# Altium PCB PCB1.PcbDoc (part 2 of 3)
Units mm, origin at the board's own origin, x right, y up, seen from the top; angles counter-clockwise.
Board outline 130 x 100 mm, 2 copper layers (Top Layer, Bottom Layer), stack 1.571 mm thick; 286 components, 215 nets, 1030 pads, 857 vias.
Unrouted connection lines stored in the file: 4.
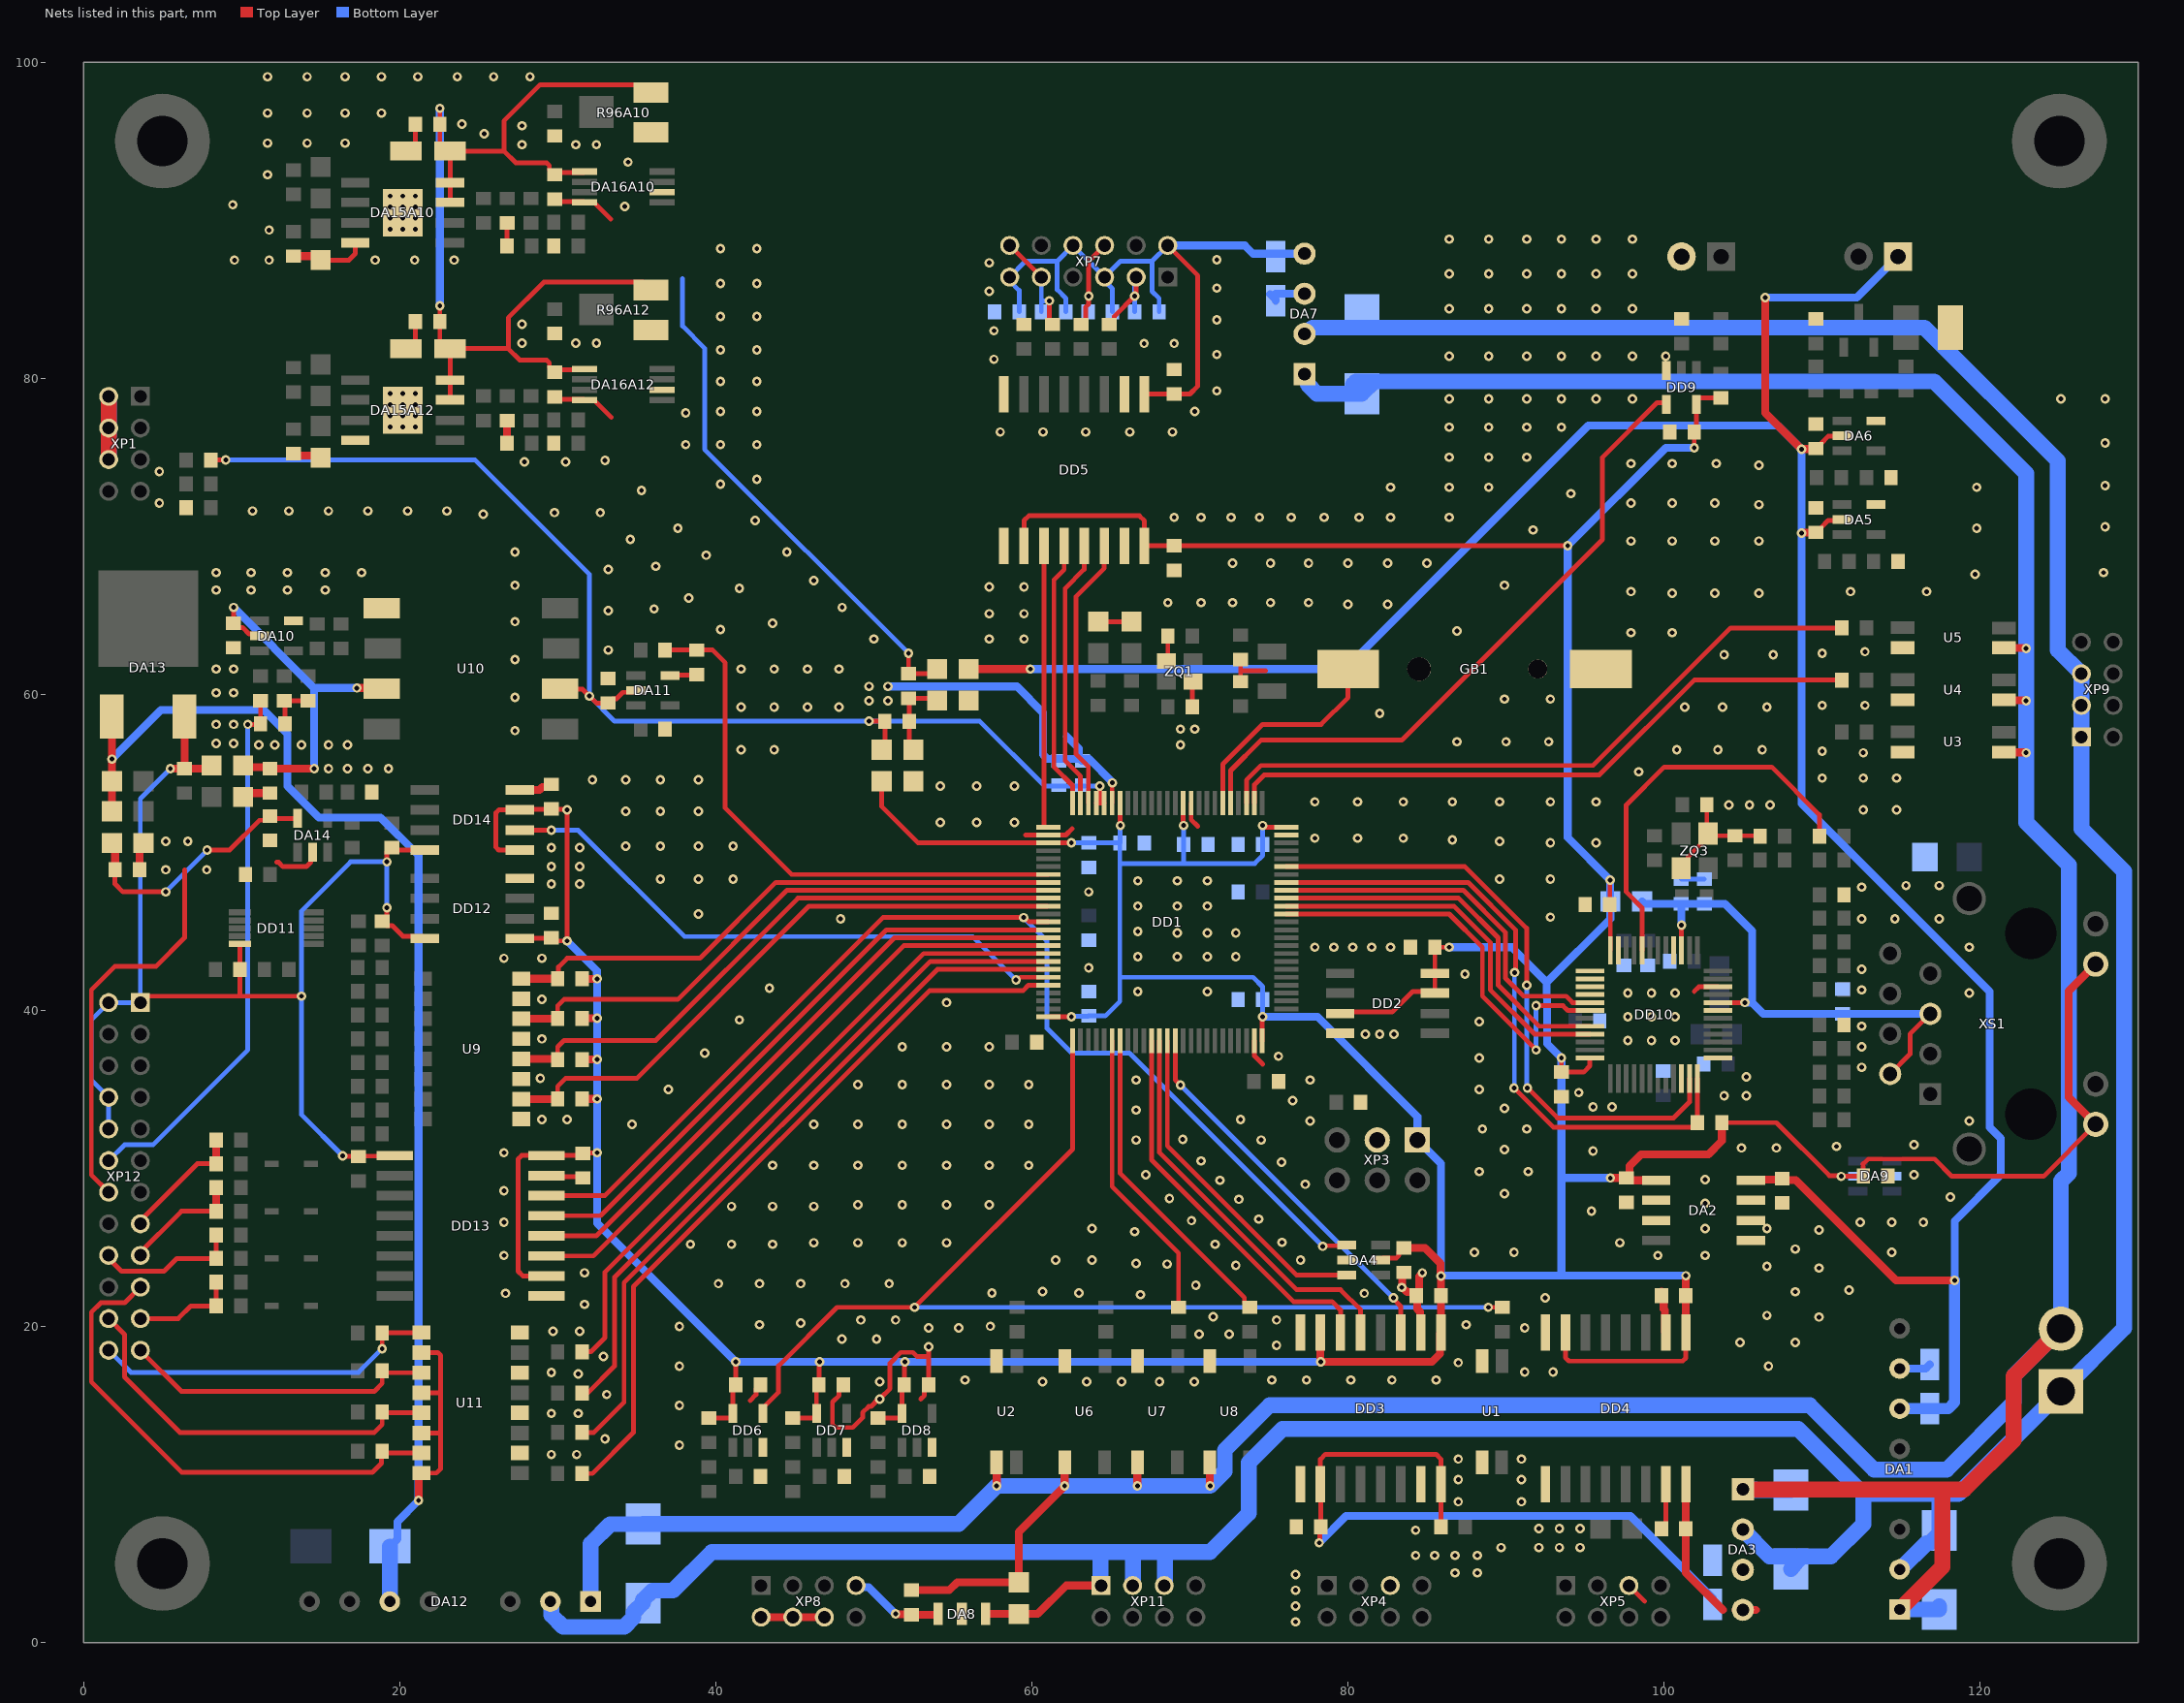
[diagram p2: the nets of this part, all layers, seen from the top]

## Via types
v1: diameter 0.6, hole 0.3, Top Layer to Bottom Layer, tented both sides, 832 vias
v2: diameter 0.6, hole 0.3, Top Layer to Bottom Layer, 25 vias

## Nets (pads, with @x,y where several pads share a name; then routed paths per layer and width w, separated by ;. In a path a pad name is that pad's centre, name@x,y a point inside that pad or via, vN(x,y) a via of type N, cw(c..) or ccw(c..) an arc to the next point about the centre after c; other vN are vias at no path point) (continued)
+3.3V: C5.1 C6.1 C9.2 C10.2 C11.2 C15.1 C16.1 C22.1 C27.1 C28.1 C29.1 C40.1 C47.1 C48.1 C49.1 C51.1 C54.1 C59.1 C64.1 C76.1 C77.1 C80.1 DA2.1 DA4.5 DA9.5 DD1.11 DD1.19 DD1.28 DD1.50 DD1.75 DD1.100 DD2.3 DD2.7 DD2.8 DD3.1 DD3.7 DD4.1 DD4.7 DD5.10 DD5.16 DD6.5 DD7.5 DD8.5 DD9.5 DD10.24 DD10.36 DD12.1 DD13.10 DD13.16 DD14.1 DD14.3 L2.1 L5.1 R24.2 R25.2 R26.2 R32.2 R50.2 R71.1 R73.1 R74.1 R75.1 XP3.1 XS1.9 XS1.11 | length 441.2
  Top Layer w0.3: DD12.1@27.6,44.55 27.625,44.575 29.575,44.575 C76.1@29.6,44.6 29.8,44.4 v1(30.6,44.4) v1(30.6,52.7) 30.575,52.725 29.625,52.725 C80.1@29.6,52.75 29.575,52.725 27.625,52.725 DD14.3@27.6,52.7 26.3,52.7 26.1,52.5 26.1,50.326 26.276,50.15 DD14.1@27.6,50.15 ; DD13.10@29.3,23.2 27.8,23.2 27.5,23.5 27.5,30.6 27.72,30.82 DD13.16@29.3,30.82 31.47,30.82 C77.1@31.6,30.95 31.625,30.975 32.475,30.975 v1(32.5,31) ; R24.2@39.575,14.215 40.95,14.215 41.075,14.34 DD6.5@41.075,14.515 41.075,16.115 C47.1@41.275,16.315 v1(41.275,17.765) v1@41.275,17.815 ; R25.2@44.875,14.215 46.25,14.215 46.375,14.34 DD7.5@46.375,14.515 46.375,16.165 C48.1@46.525,16.315 46.545,16.335 46.545,17.745 v1(46.565,17.765) ; R26.2@50.275,14.215 51.65,14.215 51.775,14.34 DD8.5@51.775,14.515 51.775,16.165 C49.1@51.925,16.315 51.945,16.335 51.945,17.745 v1(51.965,17.765) ; L2.1@50.5,54.5 50.5,52.9 52.8,50.6 DD1.28@61.05,50.6 v1(62.5,50.6) ; DD5.10@59.5,69.4 59.5,71 59.8,71.3 66.8,71.3 67.12,70.98 DD5.16@67.12,69.4 C40.1@69,69.4 v1(93.9,69.4) ; DD1.50@61.05,39.6 v1(62.5,39.6) ; DD1.19@65.575,53.125 65.575,51.725 v1(65.6,51.7) ; DD1.11@69.575,53.125 69.575,51.725 v1(69.6,51.7) ; DD1.75@74.575,38.075 74.575,39.575 v1(74.6,39.6) ; v1(74.6,51.7) 74.681,51.7 74.781,51.6 DD1.100@76.1,51.6 ; v1@78.255,17.715 v1@78.275,17.715 ; DD2.3@79.5,39.9 82.8,39.9 84.1,41.2 85.5,41.2 DD2.8@85.5,42.35 C22.1@85.5,44 v1(86.4,44) ; DA4.5@82.075,24.2 82.2,24.325 83.049,24.325 83.225,24.501 83.225,24.7 83.5,24.975 C29.1@83.55,24.975 ; v1(93.5,37) C64.1@93.5,36.1 94.9,36.1 95.3,36.5 DD10.36@95.3,37 ; DD4.7@93.755,19.615 93.755,18.035 93.975,17.815 101.175,17.815 101.375,18.015 DD4.1@101.375,19.615 ; v1(96.59,48.25) 96.57,48.23 96.57,46.72 C59.1@96.55,46.7 96.6,46.65 DD10.24@96.6,43.8 ; v1(101.9,75.6) C51.1@101.9,76.6 102.049,76.749 102.049,77.349 ; 102.05,77.35 DD9.5@102.05,78.35 102.05,78.625 102.175,78.75 R32.2@103.6,78.75 ; R50.2@103.65,32.9 107.1,32.9 110.45,29.55 111.15,29.55 v1(111.2,29.5) 112.575,29.5 C54.1@112.6,29.525 112.6,30.3 112.9,30.6 117.1,30.6 118.2,29.5 124,29.5 XS1.9@127.3,32.799
  Top Layer w0.5: R75.1@31.55,34.4 v1(32.5,34.4) ; R74.1@31.55,36.9 v1(32.5,36.9) ; R73.1@31.55,39.5 v1(32.5,39.5) ; R71.1@31.55,42 v1(32.5,42) ; v1@78.255,17.715 DD3.7@78.255,19.615 ; v1(78.275,17.765) 85.315,17.765 85.825,18.275 85.825,19.565 DD3.1@85.875,19.615 v1(85.875,23.2) 85.856,23.219 85.856,23.994 84.875,24.975 C29.1@83.55,24.975 ; v1(96.6,29.4) C5.1@97.6,29.4 ; DA2.1@99.5,29.25 97.75,29.25 C5.1@97.6,29.4 ; DD4.1@101.375,19.615 101.375,22.215 v1(101.375,23.215) ; R50.2@103.65,32.9 103.65,31.75 102.8,30.9 98.538,30.9 97.799,30.161 97.799,29.575 97.624,29.4 C5.1@97.6,29.4 ; XS1.9@127.3,32.799 125.6,34.499 125.6,41.229 XS1.11@127.3,42.929
  Bottom Layer w0.3: v1(62.5,39.6) 62.525,39.625 63.575,39.625 C11.2@63.6,39.65 64.65,39.65 65.57,40.57 65.57,42.1 ; v1(62.5,50.6) C10.2@63.6,50.6 C6.1@65.57,50.6 ; v1(65.6,51.7) 65.585,51.685 65.585,50.615 C6.1@65.57,50.6 ; v1(69.6,51.7) C9.2@69.6,50.5 69.6,49.3 ; v1(74.6,39.6) C16.1@74.6,40.7 74.6,41.5 74,42.1 65.57,42.1 ; v1(74.6,51.7) C15.1@74.6,50.5 74.6,49.8 74.1,49.3 69.6,49.3 ; v1(111.2,29.5) 111.213,29.512 112.237,29.512 DA9.5@112.25,29.525 ; 65.57,42.1 65.57,49.3 ; 65.57,49.3 69.6,49.3 ; 65.57,49.3 C6.1@65.57,50.6
  Bottom Layer w0.5: v1(30.6,44.4) 32.481,42.519 32.481,42.019 v1(32.5,42) v1(32.5,39.5) v1(32.5,36.9) v1(32.5,34.4) v1(32.5,31) 32.5,26.54 v1(41.275,17.765) v1(46.565,17.765) v1(51.965,17.765) 78.198,17.765 78.248,17.715 v1@78.275,17.715 ; v1(74.6,39.6) 78.075,39.6 84.39,33.285 XP3.1@84.39,31.8 85.875,30.315 v1@85.875,23.218 ; v1@85.89,23.215 93.5,23.215 ; v1(86.4,44) 90.349,44 92.574,41.774 ; v1(93.9,69.4) 93.9,50.94 v1(96.59,48.25) 96.59,46.91 L5.1@96.6,46.9 96.6,45.8 92.574,41.774 ; v1@93.919,69.419 100.1,75.6 v1(101.9,75.6) ; v1(96.6,29.4) 93.5,29.4 ; v1(101.375,23.215) 93.5,23.215 ; 92.574,41.774 92.574,40.824 92.6,40.799 92.6,37.9 v1(93.5,37) 93.5,29.4 ; 93.5,23.215 93.5,29.4
+3.3VA: C7.1 C8.2 C13.2 C78.1 DA11.2 DD1.21 DD1.22 L2.2 R99.1 U10.6 | length 79.3
  Top Layer w0.3: R99.1@8.05,74.825 v1(9,74.825) ; U10.6@30.15,60.35 30.174,60.326 31.574,60.326 32.45,59.45 C78.1@33.2,59.45 33.475,59.725 33.725,59.725 34.125,60.125 34.825,60.125 DA11.2@34.95,60.25 ; v1(49.7,58.3) C7.1@50.7,58.3 ; L2.2@50.5,56.5 50.7,56.7 C7.1@50.7,58.3 ; C7.1@50.7,58.35 C7.1@50.7,58.3 ; DD1.22@64.075,53.125 64.325,53.125 ; v1(64.3,54.2) 64.3,53.15 64.325,53.125 ; DD1.21@64.575,53.125 64.325,53.125
  Bottom Layer w0.3: v1(9,74.825) 24.775,74.825 32.012,67.588 v1(32.012,59.888) 33.6,58.3 v1(49.7,58.3) 56.7,58.3 60.8,54.2 v1(64.3,54.2)
+3.3VA_ETH: C52.1 C63.1 C66.1 DD10.8 DD10.15 L5.2 XS1.2 XS1.5 | length 33.8
  Top Layer w0.3: DD10.15@101.1,43.8 101.1,44.65 v1(101.1,45.4) ; DD10.8@103.4,40.5 v1(105.1,40.5) ; XS1.2@114.3,35.977 115.559,37.236 115.559,38.506 XS1.5@116.84,39.787
  Bottom Layer w0.5: L5.2@98.6,46.9 98.75,46.75 C63.1@101.075,46.75 ; v1(101.1,45.4) 101.1,46.725 C63.1@101.075,46.75 ; v1(105.1,40.5) 105.567,40.5 ; XS1.5@116.84,39.787 106.28,39.787 105.567,40.5 ; C63.1@101.075,46.75 C66.1@102.542,46.75 103.85,46.75 105.567,45.033 105.567,40.5
+5V: C2.1 C4.1 C31.1 C32.1 DA1.6 DA2.8 DA5.2 DA6.2 L1.1 XP6.1 | length 171.5
  Top Layer w0.3: v1(108.7,70.2) v1@108.725,70.225 ; v1(108.7,75.5) v1@108.725,75.525 ; C32.1@109.575,75.525 C32.1@109.6,75.55 ; C31.1@109.625,70.225 109.925,70.525 109.925,70.551 110.381,71.007 111.207,71.007 DA5.2@111.25,71.05 ; C32.1@109.65,75.55 109.925,75.825 109.925,75.873 110.376,76.323 111.223,76.323 DA6.2@111.25,76.35
  Top Layer w0.5: L1.1@56,61.6 v1(59.9,61.6) ; DA2.8@105.5,29.25 106.1,29.25 106.15,29.3 106.396,29.3 107.4,29.3 C4.1@107.468,29.368 107.567,29.269 108.329,29.269 114.673,22.925 v2(118.375,22.925) ; v1(106.4,85.1) 106.4,77.8 v1(108.7,75.5) ; v1@108.725,70.225 C31.1@109.625,70.225 ; v1@108.725,75.525 C32.1@109.575,75.525
  Bottom Layer w0.5: v1(59.9,61.6) 79.8,61.6 95.2,77 107.2,77 v1(108.7,75.5) v1(108.7,70.2) 108.7,53.1 120.6,41.2 120.6,32.6 121.3,31.9 121.3,29.6 118.375,26.675 v2(118.375,22.925) ; v1(106.4,85.1) 112.2,85.1 XP6.1@114.8,87.7
  Bottom Layer w0.7: DA1.6@114.9,14.8 C2.1@116.8,14.8 117.965,14.8 118.375,15.21 v2(118.375,22.925)
+5V_BUS: C24.1 C25.1 C26.1 DA3.4 DD3.10 DD3.16 DD4.16 R7.1 | length 55.4
  Top Layer w0.3: v1(78.175,6.315) 78.225,6.365 78.225,7.265 C25.1@78.275,7.315 78.265,7.325 78.265,10.005 DD3.10@78.255,10.015 78.255,11.595 78.575,11.915 85.575,11.915 85.875,11.615 DD3.16@85.875,10.015 R7.1@85.875,7.315
  Top Layer w0.5: DD4.16@101.375,10.015 101.375,4.415 103.715,2.075 ; DA3.4@104.54,2.06 105.8,2.06
  Bottom Layer w0.5: v1(78.175,6.315) 79.875,8.015 97.875,8.015 C24.1@103.075,2.815
+5V_FS: C34.1 C35.1 C36.1 C37.1 C39.1 C41.1 DA7.4 DD5.1 XP7.2 XP7.5 XP7.8 XP7.11 | length 46.3
  Top Layer w0.3: DD5.1@67.12,79 C39.1@69,79 70,79 70.5,79.5 70.5,86.5 XP7.2@68.6,88.4
  Bottom Layer w0.3: C34.1@59.2,84.2 59.2,85.556 58.6,86.156 XP7.11@58.6,86.4 59.6,87.4 61.6,87.4 ; C35.1@62.15,84.2 62.15,85.05 61.6,85.6 61.6,87.4 ; C36.1@65.1,84.2 65.1,85.656 64.6,86.156 XP7.5@64.6,86.4 ; C37.1@68.05,84.2 68.05,85.05 67.6,85.5 67.6,87.4 ; XP7.2@68.6,88.4 67.6,87.4 ; 61.6,87.4 XP7.8@62.6,88.4 XP7.5@64.6,86.4 ; XP7.5@64.6,86.4 65.6,87.4 67.6,87.4
  Bottom Layer w0.5: XP7.2@68.6,88.4 73.475,88.4 73.995,87.88 DA7.4@77.25,87.88
+5V_HW: C69.1 C74.1 C75.1 C83.1 C84.1 DA13.3 DD11.10 DD12.8 DD13.1 DD14.8 L6.1 XP12.1 XP12.2 XP12.8 XP12.10 | length 83.1
  Top Layer w0.3: XP12.1@3.6,40.5 4,40.9 9.9,40.9 ; DD11.10@9.9,44.2 C69.1@9.9,42.6 9.9,40.9 ; v1(13.8,40.9) 9.9,40.9 ; v1(16.4,30.8) 16.425,30.775 17.425,30.775 17.435,30.785 19.665,30.785 DD13.1@19.7,30.82 ; C74.1@18.8,45.65 18.925,45.65 19.2,45.925 v1(19.2,46.5) ; C74.1@18.9,45.65 19.175,45.375 19.525,45.375 20.2,44.7 21.45,44.7 DD12.8@21.6,44.55 ; v1(19.2,49.4) 19.2,50.025 19.475,50.3 C83.1@19.5,50.3 19.65,50.15 DD14.8@21.6,50.15
  Top Layer w0.5: v1(5.5,55.3) C84.1@6.4,55.3 ; DA13.3@6.375,58.6 6.4,58.575 C84.1@6.4,55.3 ; L6.1@8.1,55.5 7.9,55.3 C84.1@6.4,55.3
  Bottom Layer w0.3: XP12.10@1.6,32.5 XP12.8@1.6,34.5 0.5,35.6 0.5,39.4 XP12.2@1.6,40.5 XP12.1@3.6,40.5 3.6,53.4 v1(5.5,55.3) ; v1(16.4,30.8) 13.8,33.4 v1(13.8,40.9) 13.8,46.3 16.9,49.4 v1(19.2,49.4) v1(19.2,46.5)
+5VA: C3.1 C92A10.1 C92A12.1 C93A10.1 C93A12.1 C96A10.1 C96A12.1 DA15A10.7 DA15A10.8 DA15A12.7 DA15A12.8 DA16A10.1 DA16A12.1 L1.2 R96A10.3 R96A12.3 | length 101.3
  Top Layer w0.3: v1(22.55,84.575) C92A12.1@22.55,83.575 22.55,82.325 23,81.875 C93A12.1@23.2,81.875 ; v1(22.55,97.075) C92A10.1@22.55,96.075 22.55,94.825 23,94.375 C93A10.1@23.2,94.375 ; DA15A12.7@23.2,78.625 DA15A12.8@23.2,79.875 C93A12.1@23.2,81.875 ; DA15A10.7@23.2,91.125 DA15A10.8@23.2,92.375 C93A10.1@23.2,94.375 ; DA16A12.1@31.7,80.575 31.65,80.525 29.95,80.525 C96A12.1@29.8,80.375 29.75,80.375 29.475,80.65 29.475,80.974 29.299,81.15 27.6,81.15 26.875,81.875 ; DA16A10.1@31.7,93.075 31.65,93.025 29.95,93.025 C96A10.1@29.8,92.875 29.75,92.875 29.475,93.15 29.475,93.449 29.299,93.625 27.35,93.625 26.6,94.375 ; R96A12.3@35.9,85.575 35.4,86.075 29.125,86.075 26.875,83.825 26.875,81.875 ; R96A10.3@35.9,98.075 35.4,98.575 28.9,98.575 26.6,96.275 26.6,94.375 ; v1(52.2,62.6) C3.1@52.2,61.3 53.7,61.3 L1.2@54,61.6 ; C93A12.1@23.2,81.875 26.875,81.875 ; C93A10.1@23.2,94.375 26.6,94.375
  Bottom Layer w0.3: 37.9,86.3 37.9,83.3 39.3,81.9 39.3,75.5 v1(52.2,62.6)
  Bottom Layer w0.5: v1(22.55,84.575) v1(22.55,97.075)
+5VA_HW: C71.1 C88.1 DA10.2 L6.2 U10.3 | length 24.3
  Top Layer w0.3: C71.1@9.3,64.3 9.368,64.232 10.068,64.232 10.475,63.825 11.025,63.825 DA10.2@11.15,63.7 ; C71.1@9.5,64.5 v1(9.5,65.5) ; U10.3@18.825,60.4 U10.3@18.875,60.35
  Top Layer w0.5: L6.2@10.1,55.5 10.2,55.4 11.7,55.4 C88.1@11.8,55.3 v1(14.6,55.3) ; v1(17.3,60.4) U10.3@18.825,60.4
  Bottom Layer w0.5: v1(9.5,65.5) 14.6,60.4 ; v1(14.6,55.3) 14.6,60.4 ; v1(17.3,60.4) 14.6,60.4
+12V: C43.1 DA8.1 XP8.7 | length 6
  Top Layer w0.5: v1(51.375,1.815) 51.394,1.796 52.506,1.796 52.525,1.815 52.575,1.765 54.04,1.765 54.04,1.78 DA8.1@54.075,1.815
  Bottom Layer w0.5: XP8.7@48.875,3.615 48.98,3.51 49.68,3.51 v1@51.356,1.834
+24V: C1.1 C23.1 C38.1 C42.2 C81.1 DA1.2 DA3.2 DA7.2 DA8.3 DA12.2 XP2.1 XP9.1 XP9.3 XP9.5 XP11.1 XP11.3 XP11.5 | length 254.2
  Top Layer w0.5: DA8.3@57.075,1.815 C42.2@59.175,1.815 60.375,1.815 62.175,3.615 XP11.1@64.375,3.615
  Bottom Layer w1: DA12.2@29.597,2.543 29.597,1.755 30.352,1 34.214,1 34.8,1.586 34.8,1.915 35.4,2.515 35.4,2.7 36,3.3 37.3,3.3 39.74,5.74 64.35,5.74 ; XP11.1@64.375,3.615 64.35,3.64 64.35,5.74 ; XP11.3@66.375,3.615 66.4,3.64 66.4,5.715 66.425,5.74 ; XP11.5@68.375,3.615 68.413,3.653 68.413,5.653 68.5,5.74 ; DA7.2@77.119,82.669 77.228,82.669 77.758,83.2 116.475,83.2 124.9,74.775 124.9,62.8 XP9.5@126.362,61.338 ; DA3.2@104.975,7.155 106.665,5.465 C23.1@108.235,5.465 ; C23.1@108.025,4.665 108.531,5.265 108.531,5.45 110.55,5.45 112.6,7.5 112.6,9.4 ; DA1.2@114.94,4.64 116.6,6.3 116.8,6.3 117.4,6.9 C1.1@117.4,7.1 117.4,9.4 ; XP9.5@126.4,61.3 XP9.3@126.4,59.3 XP9.1@126.4,57.3 126.4,51.5 129.1,48.8 129.1,19.9 XP2.1@125.1,15.9 118.6,9.4 117.4,9.4 ; 64.35,5.74 66.425,5.74 ; 66.425,5.74 68.5,5.74 ; 68.5,5.74 71.275,5.74 73.725,8.19 73.725,11.39 75.85,13.515 108.485,13.515 112.6,9.4 ; 112.6,9.4 117.4,9.4
+24V_HW: C82.2 C85.1 DA12.6 DA13.1 L7.1 U11.10 U11.12 U11.14 U11.16 | length 94.5
  Top Layer w0.3: U11.16@21.38,10.73 22.33,10.73 22.6,11 22.6,13.2 ; U11.14@21.38,13.27 22.53,13.27 22.6,13.2 ; U11.12@21.38,15.81 22.59,15.81 22.6,15.8 ; U11.10@21.38,18.35 22.424,18.35 22.6,18.174 22.6,15.8 ; 22.6,13.2 22.6,15.8
  Top Layer w0.5: L7.1@1.8,52.6 C82.2@1.8,54.5 v1(1.8,55.9) DA13.1@1.8,58.6 ; v1(21.2,9) 21.219,9.019 21.219,10.569 U11.16@21.38,10.73
  Bottom Layer w0.5: v1(1.8,55.9) 4.9,59 11.4,59 12.9,57.5 12.9,54.2 14.9,52.2 18.8,52.2 21.2,49.8 v1(21.2,9) 19.857,7.657 19.857,6.557 C85.1@19.38,6.08
  Bottom Layer w1: DA12.6@19.38,2.6 C85.1@19.38,6.08
+24VA_HW: C87.1 C89.1 DA14.5 L7.2 | length 16.4
  Top Layer w0.3: L7.2@1.8,50.6 L7.2@2,50.4 ; C89.1@2,48.9 2,48 2.5,47.5 v1(5.2,47.5) ; v1(7.825,50.15) 9.25,50.15 11.132,52.032 11.532,52.032 C87.1@11.8,52.3 ; C87.1@11.8,52.15 DA14.5@13.55,52.15
  Top Layer w0.5: C89.1@2,48.9 L7.2@2,50.4
  Bottom Layer w0.3: v1(5.2,47.5) v1@7.825,50.125
+VBAT: DD1.6 GB1.2 | length 13.9
  Top Layer w0.3: DD1.6@72.075,53.125 72.075,55.575 74.6,58.1 78.3,58.1 80,59.8 GB1.2@80,61.6
ACTn: DD10.20 R42.2 | length 25.4
  Top Layer w0.3: DD10.20@98.6,43.8 98.6,46.5 97.6,47.5 97.6,53 100,55.4 106.8,55.4 109.825,52.375 R42.2@109.825,51.012
AGND: C3.2 C7.2 C8.1 C13.1 C78.2 C79.2 C90A10.1 C90A12.1 C92A10.2 C92A12.2 C93A10.2 C93A12.2 C94A10.2 C94A12.2 C95A10.2 C95A12.2 C96A10.2 C96A12.2 C97.2 DA11.5 DA15A10.4 DA15A10.EPAD DA15A12.4 DA15A12.EPAD DA16A10.4 DA16A10.6 DA16A12.4 DA16A12.6 DD1.20 R1.2 R2.2 R76.2 R91A10.2 R91A12.2 R95A10.1 R95A12.1 R96A10.1 R96A12.1 R97A10.2 R97A12.2 XP1.2 XP1.4 XP1.6 | length 58.2
  Top Layer w0.3: R91A10.2@15,87.475 16.8,87.475 17.2,87.875 DA15A10.4@17.2,88.575 ; C93A10.2@20.4,94.375 20.55,94.375 21,94.825 C92A10.2@21,96.075 ; C93A12.2@21,82.225 C92A12.2@21,83.575 ; R97A10.2@26.8,88.375 C94A10.2@26.8,89.825 ; C96A12.2@29.8,78.825 29.95,78.675 31.65,78.675 DA16A12.4@31.7,78.625 32.3,78.625 33.4,77.525 ; C96A10.2@29.8,91.325 29.95,91.175 31.65,91.175 DA16A10.4@31.7,91.125 32.3,91.125 33.35,90.075 ; DA11.5@37.1,61.2 37.125,61.225 38.775,61.225 C79.2@38.8,61.25 ; C3.2@52.2,59.75 C3.2@52.25,59.75 ; R2.2@52.5,56.5 52.25,56.75 C7.2@52.25,58.3 C3.2@52.25,59.75 ; R1.2@53.8,59.6 53.65,59.75 C3.2@52.25,59.75 ; DD1.20@65.075,53.125 65.075,54.375 v1(65.1,54.4)
  Top Layer w0.5: C90A12.1@13.3,75.225 13.425,75.1 14.875,75.1 R91A12.2@15,74.975 ; C90A10.1@13.3,87.725 14.75,87.725 R91A10.2@15,87.475 ; C93A12.2@20.4,81.875 20.65,81.875 C93A12.2@21,82.225 ; R97A12.2@26.8,75.875 C94A12.2@26.8,77.325
  Top Layer w1: XP1.6@1.6,74.85 XP1.4@1.6,76.85 XP1.2@1.6,78.85
  Bottom Layer w0.5: v1(50.9,60.5) 59.049,60.5 60.711,58.837 60.711,56.189 60.989,55.911 C13.1@63.039,55.911 ; 62.209,57.337 62.975,56.571 62.975,55.975 C13.1@63.039,55.911 ; C13.1@63.2,55.8 63.15,55.8 C13.1@63.039,55.911 ; v1(65.1,54.4) 65.1,54.449 63.637,55.911 C13.1@63.039,55.911
  Bottom Layer w1: XP1.6@1.6,74.85 XP1.2@1.6,78.85
  other v1: 41.6,56.5 43.7,56.5 27.3,57.7 41.6,59.2 43.7,59.2 45.8,59.2 47.8,59.2 49.7,59.6 50.9,59.6 27.3,59.8 49.7,60.5 41.6,61.6 43.7,61.6 45.8,61.6 47.8,61.6 27.3,62.2 33.2,62.8 50,63.5 40.3,64.1 43.6,64.5 27.3,64.6 33.2,65.3 36.1,65.4 48,65.5 38.3,66.1 41.5,66.7 27.3,66.9 46.2,67.2 33.2,67.9 36.2,68.1 39.4,68.8 27.3,69 44.5,69 34.6,69.8 37.6,70.5 42.5,71 25.3,71.4 29.8,71.5 32.7,71.5 10.7,71.6 13,71.6 15.5,71.6 18,71.6 20.5,71.6 23,71.6 4.8,72.1 35.3,72.9 40.3,73.3 42.6,73.6 4.8,74.1 27.9,74.7 30.5,74.7 33,74.8 38.1,75.8 40.3,75.8 42.6,75.8 38.1,77.8 40.3,77.9 42.6,77.9 40.3,79.8 42.6,79.8 40.3,81.8 42.6,81.8 27.75,82.225 31.15,82.225 32.45,82.225 27.75,83.425 40.3,83.9 42.6,83.9 40.3,86 42.6,86 9.55,87.475 11.75,87.475 18.45,87.475 20.95,87.475 23.45,87.475 40.3,88.2 42.6,88.2 11.75,89.375 34.25,90.875 9.45,90.975 11.65,92.875 34.45,93.675 27.75,94.775 31.15,94.775 32.45,94.775 11.65,94.875 14.15,94.875 16.55,94.875 25.35,95.475 27.75,95.975 23.95,96.075 11.65,96.775 14.15,96.775 16.55,96.775 18.85,96.775 11.65,99.075 14.15,99.075 16.55,99.075 18.85,99.075 21.15,99.075 23.65,99.075 25.95,99.075 28.25,99.075
  other v2: 19.4,76.925 20.2,76.925 21,76.925 19.4,77.625 20.2,77.625 21,77.625 19.4,78.325 20.2,78.325 21,78.325 19.4,79.025 20.2,79.025 21,79.025 19.4,89.425 20.2,89.425 21,89.425 19.4,90.125 20.2,90.125 21,90.125 19.4,90.825 20.2,90.825 21,90.825 19.4,91.525 20.2,91.525 21,91.525
AGND_HW: C71.2 C86.2 C87.2 C88.2 C89.2 DA10.5 DA14.2 R53.2 R60.2 R72.2 R83.2 R84.1 R85.2 U10.1 XP12.14 | length 34.6
  Top Layer w0.3: XP12.14@1.6,28.5 0.5,29.6 0.5,41.3 2,42.8 4.6,42.8 6.4,44.6 6.4,48.9 ; R85.2@3.55,50.35 R85.2@3.8,50.6 ; 12.225,49.375 12.349,49.375 12.624,49.1 14.099,49.1 14.375,49.376 14.375,49.875 DA14.2@14.5,50 ; R53.2@12.75,58.15 12.75,59.55 R60.2@12.7,59.6 R72.2@14.2,59.6 ; U10.1@18.825,65.5 U10.1@18.875,65.45
  Top Layer w0.5: C89.2@3.55,48.9 R85.2@3.55,50.35 ; R83.2@10.1,53.5 10.35,53.75 C88.2@11.8,53.75 C88.2@11.9,53.75
  other v1: 5.2,48.9 7.8,48.9 5.2,50.7 6.6,50.7 15.5,55.3 16.7,55.3 18,55.3 19.3,55.3 11.1,56.8 12.1,56.8 13.8,56.8 15.5,56.8 16.7,56.8 8.4,56.9 9.5,56.9 8.4,58.1 9.5,58.1 8.4,60.1 9.5,60.1 8.4,61.6 9.5,61.6 8.4,66.6 10.6,66.6 12.9,66.6 15.3,66.6 8.4,67.7 10.6,67.7 12.9,67.7 15.3,67.7 17.6,67.7
AN_MOD: DD1.62 DD3.5 | length 25.4
  Top Layer w0.3: DD1.62@68.075,38.075 68.075,31 76.75,22.325 79.525,22.325 80.795,21.055 DD3.5@80.795,19.615
AN_MOD_HW: R53.1 R56.1 XP12.12 | length 34.5
  Top Layer w0.3: v1(10.4,58.1) 11.15,58.1 R53.1@11.2,58.15 R56.1@11.2,59.6
  Bottom Layer w0.3: XP12.12@1.6,30.5 2.6,31.5 4.4,31.5 10.4,37.5 v1@10.4,58.074
BUS_IL: DD1.61 DD3.6 | length 24.8
  Top Layer w0.3: DD1.61@67.575,38.075 67.575,30.55 76.55,21.575 79,21.575 79.525,21.05 DD3.6@79.525,19.615
COM1_HW: R55.2 R62.1 XP12.17 | length 7.7
  Top Layer w0.3: XP12.17@3.4,24.5 6.2,27.3 R62.1@8.4,27.3
  Top Layer w0.5: R62.1@8.4,27.3 R55.2@8.4,28.8
COM2_HW: R58.2 R69.1 XP12.18 | length 9.2
  Top Layer w0.3: XP12.18@1.4,24.5 2.4,23.5 5.1,23.5 5.9,24.3 R69.1@8.4,24.3 R58.2@8.4,25.8
COM3_HW: R61.2 R63.1 XP12.21 | length 6.6
  Top Layer w0.3: XP12.21@3.6,20.5 6,20.5 6.8,21.3 R63.1@8.4,21.3 R61.2@8.4,22.8
CRASH_COL: DD1.57 R35.2 | length 20.3
  Top Layer w0.3: DD1.57@65.575,38.075 65.575,29.7 73.45,21.825 73.45,21.49 73.725,21.215 R35.2@73.775,21.215
CRASH_IND: DD1.3 R30.2 | length 43.1
  Top Layer w0.3: DD1.3@73.575,53.125 73.575,54.575 74.5,55.5 95.5,55.5 104.2,64.2 R30.2@111.25,64.2
DIG_MOD: DA4.3 DD1.63 | length 21.6
  Top Layer w0.3: DD1.63@68.575,38.075 68.575,31.425 76.75,23.25 DA4.3@80.1,23.25
DIG_MOD_HW: R52.2 R68.1 XP12.15 | length 8.1
  Top Layer w0.3: XP12.15@3.4,26.5 7.2,30.3 R68.1@8.4,30.3
  Top Layer w0.5: R68.1@8.4,30.3 R52.2@8.4,31.8
DRV_ON: DD1.64 DD3.3 | length 24.4
  Top Layer w0.3: DD1.64@69.075,38.075 69.075,35.601 v1(69.4,35.275) ; v1(82.883,21.815) 82.883,21.734 83.335,21.281 DD3.3@83.335,19.615
  Bottom Layer w0.3: v1(69.4,35.275) v1@82.86,21.815
EMER_BUT: DD1.51 DD6.4 R9.1 | length 71.7
  Top Layer w0.3: DD6.4@42.975,14.515 42.975,14.84 43.975,15.84 43.975,17.515 47.675,21.215 v1(52.575,21.215) 62.575,31.215 DD1.51@62.575,38.075 ; v1(88.875,21.215) R9.1@89.775,21.215
  Bottom Layer w0.3: v1(52.575,21.215) v1(88.875,21.215)
EMIS_COL: DD1.56 R34.2 | length 18.6
  Top Layer w0.3: DD1.56@65.075,38.075 65.075,28.85 69.275,24.65 R34.2@69.275,21.215
EMIS_IND: DD1.2 R29.2 | length 41.1
  Top Layer w0.3: DD1.2@74.075,53.125 74.075,54.275 74.7,54.9 95.9,54.9 101.9,60.9 R29.2@111.25,60.9
ETH_CS: DD1.92 DD10.29 | length 23.8
  Top Layer w0.3: DD1.92@76.1,47.6 87.3,47.6 89.95,44.95 89.95,42.05 91.1,40.9 93.8,40.9 94.2,40.5 DD10.29@95.3,40.5
ETH_INT: DD1.95 DD10.47 | length 39.9
  Top Layer w0.3: DD1.95@76.1,49.1 87.4,49.1 91.3,45.2 v1(91.3,41.6) ; v1(91.35,35.1) 93.25,33.2 100.6,33.2 101.6,34.2 DD10.47@101.6,35.7
  Bottom Layer w0.3: v1(91.3,41.6) 91.3,35.15 v1(91.35,35.1)
ETH_MISO: DD1.90 DD10.33 | length 24.3
  Top Layer w0.3: DD1.90@76.1,46.6 86.7,46.6 89,44.3 89,41.3 91.8,38.5 DD10.33@95.3,38.5
ETH_MOSI: DD1.91 DD10.32 | length 24.3
  Top Layer w0.3: DD1.91@76.1,47.1 87,47.1 89.5,44.6 89.5,41.6 92.1,39 DD10.32@95.3,39
ETH_RST: DD1.93 DD10.48 R50.1 | length 41.4
  Top Layer w0.3: DD1.93@76.1,48.1 87.6,48.1 90.6,45.1 90.6,42.45 v1(90.55,42.4) ; v1(90.5,35.1) 93,32.6 101.825,32.6 102.1,32.875 R50.1@102.1,32.9 DD10.48@102.1,35.7
  Bottom Layer w0.3: v1(90.5,35.1) 90.525,35.125 90.525,42.375 v1(90.55,42.4)
ETH_SCLK: DD1.89 DD10.30 | length 27.5
  Top Layer w0.3: DD1.89@76.1,46.1 86.4,46.1 88.5,44 88.5,40.9 v1(91.9,37.5) ; v1(91.9,40.3) 93.6,40.3 93.9,40 DD10.30@95.3,40
  Bottom Layer w0.3: v1(91.9,37.5) v1(91.9,40.3)
EXT_AN_MOD: C79.1 DD1.32 R77.2 | length 35.5
  Top Layer w0.3: R77.2@36.8,62.8 C79.1@38.8,62.8 39.8,62.8 40.6,62 40.6,52.8 44.8,48.6 DD1.32@61.05,48.6
EXT_COM1: DD1.39 DD13.13 | length 39.2
  Top Layer w0.3: DD13.13@29.3,27.01 32.71,27.01 50.8,45.1 DD1.39@61.05,45.1
EXT_COM2: DD1.40 DD13.12 | length 39.6
  Top Layer w0.3: DD13.12@29.3,25.74 32.44,25.74 51.3,44.6 DD1.40@61.05,44.6
EXT_COM3: DD1.41 DD13.11 | length 39.9
  Top Layer w0.3: DD13.11@29.3,24.47 32.27,24.47 51.9,44.1 DD1.41@61.05,44.1
EXT_DIG_MOD: DA4.1 DD1.38 DD13.14 | length 71.5
  Top Layer w0.3: DD13.14@29.3,28.28 32.98,28.28 50.575,45.875 v1(59.475,45.875) 59.556,45.875 59.831,45.6 DD1.38@61.05,45.6 ; v1(78.401,25.076) 78.438,25.113 79.888,25.113 DA4.1@79.925,25.15
  Bottom Layer w0.3: v1(59.475,45.875) 60.95,44.4 60.95,38.875 62.525,37.3 66.176,37.3 v1(78.401,25.076)
EXT_FLAG1: DD1.46 R78.2 | length 47.7
  Top Layer w0.3: R78.2@31.55,10.7 32.2,10.7 34.8,13.3 34.8,22.525 53.525,41.25 59.439,41.25 59.789,41.6 DD1.46@61.05,41.6
EXT_FLAG2: DD1.44 R79.2 | length 46.1
  Top Layer w0.3: R79.2@31.55,13.3 32.3,13.3 34.2,15.2 34.2,22.775 54.025,42.6 DD1.44@61.05,42.6
EXT_FLAG3: DD1.43 R80.2 | length 44.2
  Top Layer w0.3: R80.2@31.55,15.8 31.9,15.8 33.6,17.5 33.6,23.125 53.575,43.1 DD1.43@61.12,43.1
EXT_FLAG4: DD1.42 R81.2 | length 42.3
  Top Layer w0.3: R81.2@31.55,18.4 32.1,18.4 33,19.3 33,23.45 53.15,43.6 DD1.42@60.959,43.6
EXT_IL1: DD1.33 R71.2 U9.16 | length 36.2
  Top Layer w0.3: R71.2@30,42 30.055,42.055 30.055,42.749 30.606,43.3 39,43.3 43.8,48.1 60.337,48.1 DD1.33@60.943,48.1
  Top Layer w0.5: U9.16@27.7,42.01 R71.2@30,42.01
EXT_IL2: DD1.34 R73.2 U9.14 | length 37.2
  Top Layer w0.3: R73.2@30,39.5 30,40.3 30.4,40.7 37.6,40.7 44.5,47.6 DD1.34@61.05,47.6
  Top Layer w0.5: U9.14@27.7,39.47 R73.2@30,39.47
EXT_KEY: DD1.35 R74.2 U9.12 | length 38
  Top Layer w0.3: R74.2@30,36.9 30,37.7 30.4,38.1 36.2,38.1 45.2,47.1 DD1.35@61.05,47.1
  Top Layer w0.5: U9.12@27.7,36.93 R74.2@30,36.93
EXT_MP_EN: DD1.36 R75.2 U9.10 | length 38.8
  Top Layer w0.3: R75.2@30,34.4 30,35.2 30.5,35.7 35,35.7 45.9,46.6 60.337,46.6 DD1.36@61,46.6
  Top Layer w0.5: U9.10@27.7,34.39 R75.2@30,34.39
EXT_PMO: DD1.45 DD14.2 | length 37.3
  Top Layer w0.3: DD14.2@27.719,51.4 v1(29.6,51.4) ; v1(59,41.925) 59.081,41.925 59.256,42.1 DD1.45@61.05,42.1
  Bottom Layer w0.3: v1(29.6,51.4) 31.3,51.4 38.025,44.675 56.25,44.675 v1(59,41.925)
FIBER_IL: DD1.5 DD9.4 | length 42.3
  Top Layer w0.3: DD1.5@72.575,53.125 72.575,55.175 74.5,57.1 83.4,57.1 96.1,69.8 96.1,75 99.55,78.45 DD9.4@100.15,78.45
FLAG1_HW: R86.2 U11.15 XP12.19 | length 32.3
  Top Layer w0.3: XP12.19@3.6,22.5 2.6,21.5 1.1,21.5 0.5,20.9 0.5,16.5 6.23,10.77 18.27,10.77 18.851,11.351 18.851,11.951 18.9,12 U11.15@21.38,12
FLAG2_HW: R87.2 U11.13 XP12.22 | length 25.3
  Top Layer w0.3: XP12.22@1.6,20.5 2.6,19.5 2.6,16.8 6.1,13.3 18.4,13.3 18.9,13.8 18.9,14.54 U11.13@21.38,14.54
FLAG3_HW: R89.2 U11.11 XP12.23 | length 19.9
  Top Layer w0.3: XP12.23@3.6,18.5 6.2,15.9 18.4,15.9 18.9,16.4 R89.2@18.9,17.2 ; R89.2@18.83,17.08 U11.11@21.38,17.08
FLAG4_HW: R90.2 U11.9 XP12.24 | length 22
  Top Layer w0.3: v1(18.9,18.6) R90.2@18.9,19.6 U11.9@21.36,19.6
  Bottom Layer w0.3: XP12.24@1.6,18.5 3,17.1 17.4,17.1 v1(18.9,18.6)
FLOW1: DD1.23 DD5.14 | length 17.3
  Top Layer w0.3: DD1.23@63.575,53.125 63.575,55.425 62.8,56.2 62.8,66.2 64.576,67.976 64.576,69.396 DD5.14@64.58,69.4
FLOW2: DD1.24 DD5.13 | length 17.2
  Top Layer w0.3: DD1.24@63.075,53.125 63.075,54.825 62.1,55.8 62.1,66.7 63.31,67.91 DD5.13@63.31,69.4
FLOW3: DD1.25 DD5.12 | length 17
  Top Layer w0.3: DD5.12@62.04,69.4 62.04,67.891 61.4,67.251 61.4,55.4 62.575,54.225 DD1.25@62.575,53.125
FLOW4: DD1.26 DD5.11 | length 18.1
  Top Layer w0.3: DD5.11@60.77,69.4 60.77,51.6 DD1.26@61.05,51.6
GND: C2.2 C4.2 C5.2 C6.2 C9.1 C10.1 C11.1 C12.2 C14.2 C15.2 C16.2 C17.2 C18.2 C19.2 C20.2 C21.2 C22.2 C27.2 C28.2 C29.2 C30.2 C31.2 C32.2 C40.2 C44.2 C45.2 C46.2 C47.2 C48.2 C49.2 C50.2 C51.2 C52.2 C53.2 C54.2 C55.2 C56.2 C57.2 C58.2 C59.2 C60.2 C61.2 C62.2 C63.2 C64.2 C65.2 C66.2 C67.2 C68.2 C76.2 C77.2 C80.2 DA1.7 DA2.2 DA2.3 DA2.5 DA2.6 DA2.7 DA4.2 DA5.5 DA6.5 DA9.2 DD1.10 DD1.27 DD1.74 DD1.99 DD2.4 DD3.2 DD3.8 DD4.2 DD4.8 DD5.9 DD5.15 DD6.3 DD7.3 DD8.3 DD9.3 DD10.1 DD10.7 DD10.10 DD10.16 DD10.23 DD10.25 DD10.26 DD10.27 DD10.28 DD10.46 DD12.4 DD13.9 DD13.15 DD14.4 GB1.1 R1.1 R2.1 R3.2 R4.2 R12.2 R15.1 R16.1 R46.1 U1.2 U2.2 U3.2 U4.2 U5.2 U6.3 U7.3 U8.3 U9.9 U9.11 U9.13 U9.15 U11.2 U11.4 U11.6 U11.8 VD1.2 VD2.2 XP3.3 XP8.2 XP8.4 XP8.6 XP10.2 ZQ1.2 ZQ1.4 ZQ3.2 ZQ3.4 | length 62.3
  Top Layer w0.3: DD13.15@29.3,29.55 29.375,29.475 31.525,29.475 C77.2@31.6,29.4 ; 42.168,15.308 42.55,15.69 42.55,16.04 C47.2@42.825,16.315 ; C48.2@48.075,16.315 47.807,16.047 47.807,15.647 47.385,15.225 47.385,13.791 47.56,13.615 48.674,13.615 49.295,14.236 49.295,14.559 49.676,14.94 49.819,14.94 50.285,15.406 50.285,15.505 50.465,15.505 51.025,16.065 51.025,17.674 51.716,18.365 52.47,18.365 52.72,18.115 53.475,18.115 ; 52.964,15.404 53.207,15.647 53.207,16.047 C49.2@53.475,16.315 53.475,18.115 ; v1(53.475,18.715) 53.475,18.115 ; 59.6,51.1 DD1.27@61.05,51.1 62.151,51.1 62.551,51.5 ; VD2.2@64.2,64.6 VD1.2@66.3,64.6 ; ZQ1.2@68.5,62.1 68.6,62.2 C18.2@68.6,63.7 ; DD1.10@70.075,53.125 70.075,52.074 70.5,51.649 ; C20.2@70.15,59.2 70.15,60.75 ZQ1.4@70.2,60.8 ; C19.2@73.2,60.8 73.2,61.5 ; C21.2@73.2,62.2 73.2,61.5 ; DD1.74@74.075,38.075 74.075,37.125 74.6,36.6 ; 74.8,61.5 73.2,61.5 ; ZQ3.4@101.075,49 101.525,49.45 101.525,49.725 102.325,50.525 102.325,50.75 ZQ3.2@102.775,51.2 102.7,51.275 C60.2@102.7,53 ; 101.9,41.2 102.2,41.5 DD10.10@103.4,41.5 ; ZQ3.2@102.925,51.05 C58.2@104.475,51.05 106.037,51.05 R46.1@106.075,51.012
  Top Layer w0.5: DD14.4@27.6,53.95 27.605,53.955 28.855,53.955 29.025,54.125 29.425,54.125 C80.2@29.6,54.3 ; XP8.2@42.875,1.615 XP8.4@44.875,1.615 XP8.6@46.875,1.615 ; C29.2@83.55,23.425 83.419,23.294 83.419,22.494 v1(83.4,22.475) 83.427,22.475 83.727,22.175 84.15,22.175 84.325,22 C27.2@84.325,21.95 ; DD3.2@84.605,19.615 84.555,19.665 84.555,20.935 84.38,21.11 84.38,21.895 C27.2@84.325,21.95 ; v1(84.7,23.4) 84.7,23.373 84.5,23.173 84.5,22.125 C27.2@84.325,21.95 ; C28.2@99.825,22.215 99.975,22.065 99.975,21.115 100.055,21.035 100.055,19.665 DD4.2@100.105,19.615
  Bottom Layer w0.3: C63.2@101.075,48.3 C66.2@102.542,48.3
  Bottom Layer w0.5: DA1.7@114.9,17.34 116.54,17.34 C2.2@116.8,17.6
  other v1: 29.6,11.9 31.2,11.9 37.7,12.5 33,12.9 29.6,14.5 31.3,14.5 37.7,15 50.375,15.415 33.1,15.7 50.375,16.515 60.675,16.515 63.475,16.515 65.675,16.515 68.075,16.515 70.275,16.515 55.775,16.615 75.175,16.615 77.375,16.615 80.175,16.615 82.775,16.615 85.575,16.615 31.3,17 29.6,17.1 91.175,17.115 92.975,17.115 37.7,17.5 106.6,17.5 86.975,17.715 32.9,18.1 75.475,18.815 104.8,19 108.3,19 47.975,19.215 50.175,19.215 70.575,19.515 72.475,19.515 29.7,19.7 31.4,19.7 53.475,19.915 55.375,19.915 91.175,19.915 37.7,20 57.375,20.015 42.775,20.115 87.475,20.115 45.375,20.215 49.175,20.415 51.375,20.415 75.475,20.415 109.8,20.6 71.475,20.615 106.5,20.7 31.7,21.4 92.475,21.815 66.875,22.015 26.7,22.1 81.025,22.1 57.475,22.115 62.975,22.115 108.3,22.2 60.675,22.215 111.7,22.3 70.375,22.615 40.175,22.715 42.775,22.715 45.375,22.715 48.175,22.715 50.975,22.715 31.7,23.4 109.8,23.7 106.5,23.8 72.9,23.875 68.551,23.951 66.6,24 61.5,24.2 63.8,24.2 77,24.2 26.6,24.5 99.6,24.5 102.6,24.5 88,24.7 90.5,24.7 114.4,24.7 108.3,24.9 38.4,25.2 41,25.2 43.6,25.2 71.6,25.2 46.2,25.3 49,25.3 51.8,25.3 54.6,25.3 97.2,25.3 75.825,25.325 66.501,26.001 109.8,26.1 63.8,26.2 102.6,26.2 106.5,26.2 26.6,26.6 112.4,26.6 114.4,26.6 116.4,26.6 70.1,26.7 74.35,26.8 95.4,27.3 41,27.6 43.6,27.6 46.2,27.6 49,27.7 51.8,27.7 54.6,27.7 57.3,27.7 102.6,27.8 73.1,28.05 68.7,28.1 118.1,28.2 89.9,28.4 26.6,28.6 77.3,29 71.9,29.25 102.6,29.3 67.2,29.6 115.8,29.6 88.3,29.8 91.4,29.8 43.6,30.2 46.2,30.2 49,30.2 51.8,30.2 54.6,30.2 57.3,30.2 59.8,30.2 75.8,30.4 70.7,30.475 26.6,31 95.5,31.1 89.9,31.2 104.9,31.3 107.1,31.3 110.9,31.4 115.8,31.5 66.6,31.8 74.5,31.8 69.55,31.85 88.5,32.5 91.3,32.5 34.7,32.8 46.2,32.8 49,32.8 51.8,32.8 54.6,32.8 57.3,32.8 59.8,32.8 77.6,33 119.3,33 29,33.1 30.6,33.1 73.2,33.1 66.6,33.7 89.9,33.8 95.5,33.9 96.7,33.9 76.5,34.3 103.8,34.6 105.2,34.6 94.6,34.8 37,35 88.3,35 49,35.3 51.8,35.3 54.6,35.3 57.3,35.3 59.8,35.3 66.6,35.6 77.6,35.6 28.9,35.7 105.2,35.8 112.5,36.4 88.3,37 75.6,37.1 39.3,37.3 51.8,37.7 54.6,37.7 57.3,37.7 112.5,37.7 97.7,38.1 99.2,38.1 100.7,38.1 29,38.2 81.1,38.5 82,38.5 82.9,38.5 112.5,39 88.3,39.3 41.5,39.4 97.7,39.6 99.2,39.6 100.7,39.6 54.6,40.5 29,40.7 97.7,41.1 99.2,41.1 100.7,41.1 119.3,41.1 66.7,41.2 71.1,41.2 112.5,41.3 43.4,41.4 87.4,42.3 112.5,42.6 63.6,42.7 26.6,43.3 29,43.3 66.7,43.4 69.2,43.4 71.1,43.4 72.9,43.4 77.9,44 79.1,44 80.3,44 81.5,44 82.7,44 119.3,44 69.2,44.9 71.1,44.9 72.9,44.9 66.7,45 47.9,45.8 112.5,45.8 114.6,45.8 117.4,45.8 92.8,45.9 38.9,46.1 66.7,46.6 69.2,46.6 71.1,46.6 63.6,47.5 112.5,47.8 115.3,47.9 117.4,47.9 29.6,48 31.4,48 66.7,48.2 69.2,48.2 71.1,48.2 36.5,48.3 38.9,48.3 41.1,48.3 89.6,48.3 92.8,48.3 29.6,49.1 31.4,49.1 29.6,50.3 31.4,50.3 34.3,50.4 36.5,50.4 38.9,50.4 41.1,50.4 92.8,50.6 95.7,50.6 89.6,50.7 86.6,50.8 77.9,50.9 80.6,50.9 83.5,50.9 54.2,51.9 56.5,51.9 58.9,51.9 34.3,52.6 36.5,52.6 38.9,52.6 112.6,52.7 114.7,52.7 104.1,53 105.4,53 106.7,53 77.9,53.2 80.6,53.2 83.5,53.2 86.6,53.2 89.6,53.2 92.8,53.2 95.7,53.2 54.2,54.2 56.5,54.2 58.9,54.2 32.2,54.6 34.3,54.6 36.5,54.6 38.9,54.6 110,54.7 112.6,54.7 114.7,54.7 98.4,55.1 112.6,56.3 110,56.4 100.8,56.5 103.4,56.5 106.2,56.5 69.4,56.8 86.9,57 90,57 92.7,57 69.4,57.8 70.3,57.8 82,58.8 101.3,59.2 103.7,59.2 106.5,59.2 110,59.3 112.7,59.3 89.9,59.7 92.8,59.7 103.8,62.5 106.9,62.5 110,62.6 112.7,62.7 57.3,63.5 59.5,63.5 97.9,63.9 100.5,63.9 86.9,64 57.3,65.1 59.5,65.1 80,65.7 82.5,65.7 68.6,65.8 70.7,65.8 72.7,65.8 75.1,65.8 77.5,65.8 100.5,66.4 103.2,66.4 106,66.4 97.9,66.5 111.8,66.5 116.6,66.5 57.3,66.8 59.5,66.8 89.9,66.9 119.675,67.6 127.8,67.7 72.7,68.3 75.1,68.3 77.5,68.3 80,68.3 82.5,68.3 85,68.3 97.9,69.7 100.5,69.7 103.2,69.7 106,69.7 91.7,70.4 119.775,70.5 127.9,70.6 69,71.2 70.7,71.2 72.6,71.2 74.4,71.2 76.4,71.2 78.5,71.2 80.7,71.2 82.7,71.2 86.4,71.2 106,72 97.9,72.1 100.5,72.1 103.2,72.1 94.1,72.7 82.7,73.1 86.4,73.1 88.9,73.1 119.775,73.1 127.9,73.2 106,74.5 97.9,74.6 100.5,74.6 103.3,74.6 86.4,75 88.9,75 91.3,75 127.9,75.9 86.4,76.9 88.9,76.9 91.3,76.9 93.5,76.9 86.4,78.7 88.9,78.7 91.3,78.7 93.5,78.7 95.7,78.7 98,78.7 125.1,78.7 127.9,78.7 86.4,81.4 88.9,81.4 91.3,81.4 93.5,81.4 95.7,81.4 98,81.4 100.1,81.4 86.4,84.4 88.9,84.4 91.3,84.4 93.5,84.4 95.7,84.4 98,84.4 86.4,86.6 88.9,86.6 91.3,86.6 93.5,86.6 95.7,86.6 98,86.6 86.4,88.8 88.9,88.8 91.3,88.8 93.5,88.8 95.7,88.8 98,88.8
GND_24V: C1.2 C23.2 C38.2 C42.1 C43.2 C81.2 DA1.1 DA3.1 DA7.1 DA8.2 DA12.1 U2.3 U3.3 U4.3 U5.3 U6.4 U7.4 U8.4 XP2.2 | length 278.1
  Top Layer w0.3: U3.3@121.5,56.35 U3.3@121.525,56.325 ; U4.3@121.5,59.65 U4.3@121.525,59.625 ; U5.3@121.5,62.95 U5.3@121.525,62.925 ; v1@122.875,56.325 v1(122.9,56.3) ; v1@122.875,59.625 v1(122.9,59.6) ; v1@122.875,62.925 v1(122.9,62.9)
  Top Layer w0.5: C43.2@52.375,3.315 54.775,3.315 55.275,3.815 C42.1@59.175,3.815 59.175,7.015 v1(62.075,9.915) U6.4@62.075,11.415 ; v1(57.775,9.915) U2.3@57.775,11.415 ; v1(66.675,9.915) U7.4@66.675,11.415 ; U8.4@71.25,11.415 71.262,11.403 71.262,9.928 v1(71.275,9.915) ; U3.3@121.525,56.325 v1@122.875,56.325 ; U4.3@121.525,59.625 v1@122.875,59.625 ; U5.3@121.525,62.925 v1@122.875,62.925
  Top Layer w1: 105.8,9.68 117.6,9.68 ; DA1.1@114.9,2.1 117.6,4.8 117.6,9.68 ; XP2.2@125.1,19.86 122.1,16.86 122.1,12.8 118.98,9.68 117.6,9.68
  Bottom Layer w1: DA12.1@32.08,2.6 32.08,6.255 33.325,7.5 C81.2@35.4,7.5 ; C81.2@35.4,7.515 55.375,7.515 v1(57.775,9.915) v1(62.075,9.915) v1(66.675,9.915) v1(71.275,9.915) 72.2,10.84 72.2,12.165 75.05,15.015 109.21,15.015 113.275,10.95 117.875,10.95 122.125,15.2 122.125,16.885 XP2.2@125.1,19.86 125.1,29.2 125.6,29.7 125.6,49.2 122.9,51.9 v1(122.9,56.3) v1(122.9,59.6) v1@122.9,62.85 ; DA7.1@77.25,80.26 77.45,80.06 77.45,79.611 78.036,79.025 C38.2@80.875,79.025 ; C38.2@80.3,79.6 C38.2@80.875,79.025 ; C38.2@80.5,79.8 C38.2@81.65,79.8 ; 105.8,9.68 105.815,9.665 C23.2@108.025,9.665 ; DA1.1@114.9,2.1 C1.2@117.4,2.1 C1.2@117.4,2.3 ; v1(122.9,62.9) 122.9,73.975 117.075,79.8 C38.2@81.65,79.8 ; C38.2@80.875,79.025 C38.2@81.65,79.8
GND_BUS: C24.2 C25.2 C26.2 DA3.3 DD3.9 DD3.15 DD4.9 DD4.15 U1.3 XP4.5 XP5.5 | length 4.3
  Top Layer w0.3: XP5.5@97.775,3.615 98.775,2.615 ; C26.2@99.925,7.215 100.105,7.395 DD4.15@100.105,10.015
  other v1: 76.675,1.315 76.675,2.315 76.675,3.315 76.675,4.315 86.775,4.415 88.175,4.415 84.275,5.515 85.475,5.515 86.775,5.515 88.175,5.515 89.675,6.015 92.075,6.015 93.375,6.015 94.675,6.015 84.275,7.115 92.075,7.215 93.375,7.215 94.675,7.215 86.975,8.915 90.975,8.915 86.975,10.315 90.975,10.315 86.975,11.615 90.975,11.615
GND_FS: C34.2 C35.2 C36.2 C37.2 C39.2 C41.2 DA7.3 DD5.2 DD5.8 R17.2 R18.2 R19.2 R20.2 XP7.3 XP7.6 XP7.9 XP7.12 | length 21.1
  Top Layer w0.3: XP7.12@58.6,88.4 XP7.9@60.6,86.4 ; v1(61.1,84.9) 61.1,83.6 R18.2@61.3,83.4 ; R19.2@63.1,83.4 63.125,83.4 63.4,83.675 63.4,84.5 63.6,84.7 v1(63.6,85.2) 63.6,87.4 XP7.6@64.6,88.4 ; R20.2@64.9,83.4 64.95,83.4 65.225,83.675 65.225,83.925 v1(66.5,85.2) 66.5,85.281 66.6,85.381 XP7.3@66.6,86.4
  Bottom Layer w0.3: C35.2@60.6,84.2 60.6,84.9 ; XP7.9@60.6,86.4 60.6,84.9 ; v1(61.1,84.9) 60.6,84.9 ; C37.2@66.5,84.2 v1(66.5,85.2) 66.5,86.3 XP7.3@66.6,86.4
  Bottom Layer w0.5: C41.2@75.075,85.325 75.425,84.975 C41.2@75.425,84.9 ; C41.2@75.425,85.34 DA7.3@77.25,85.34
  other v1: 58,76.6 60.7,76.6 63.4,76.6 66.2,76.6 68.9,76.6 70.3,77.9 71.7,79.2 57.6,81.2 71.7,81.5 67.1,82.2 69,82.2 57.6,83 71.7,83.7 57.3,85.5 71.7,85.7 57.3,87.3 71.7,87.5